# EAGLE board Modulo-regulador (EAGLE 6.4)
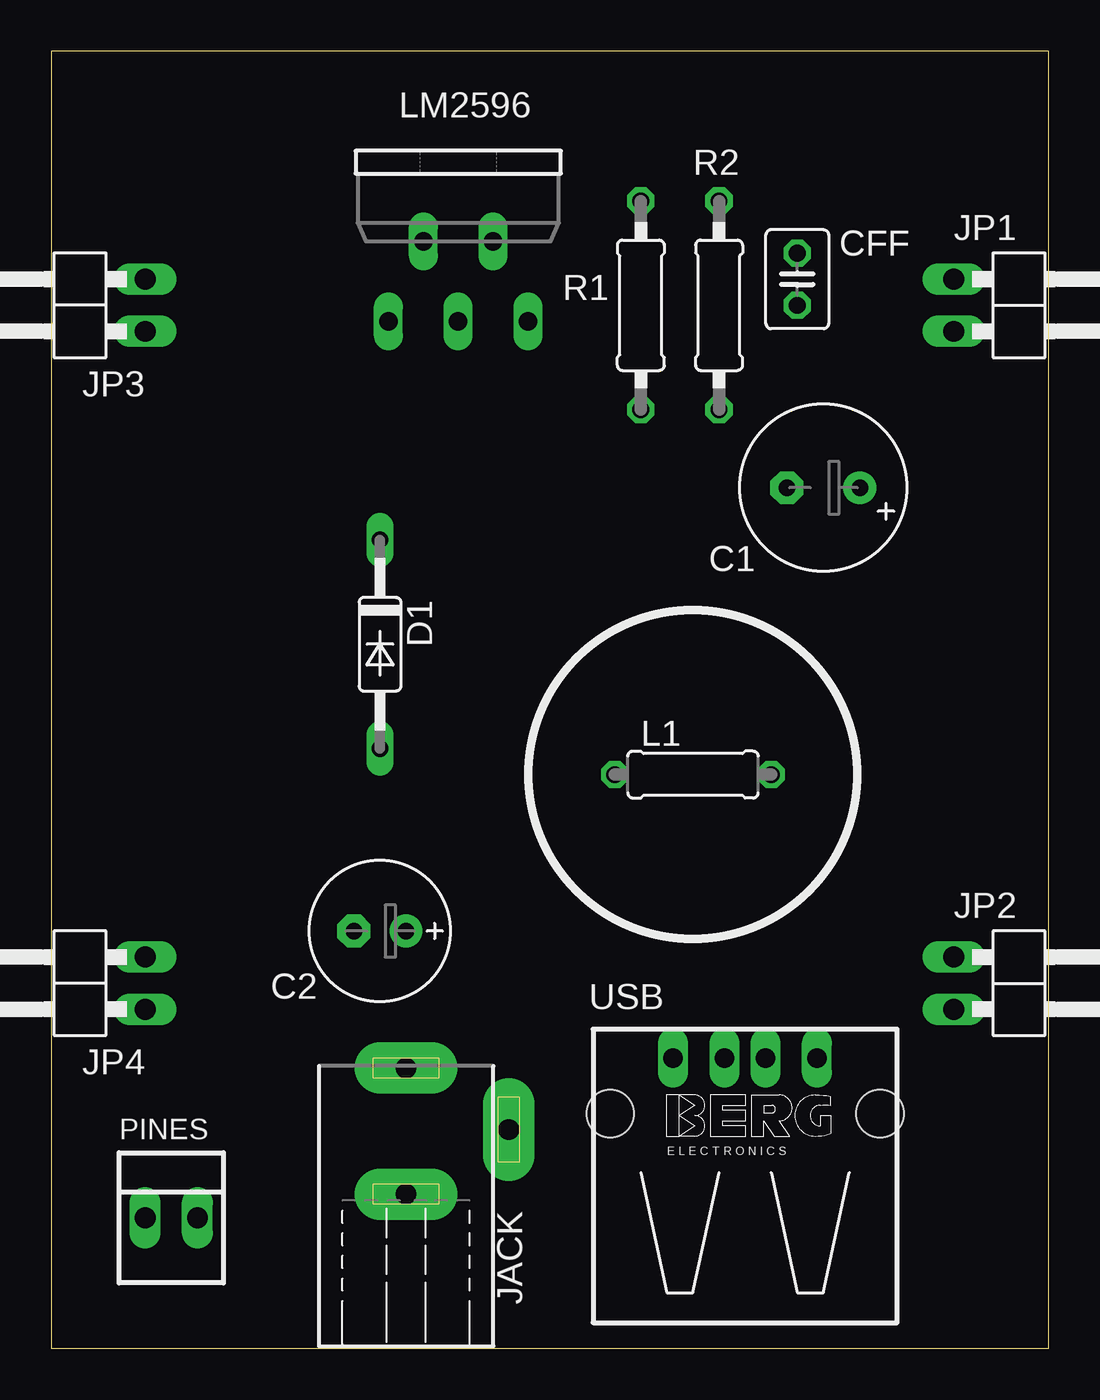
[diagram p0: board, top side]
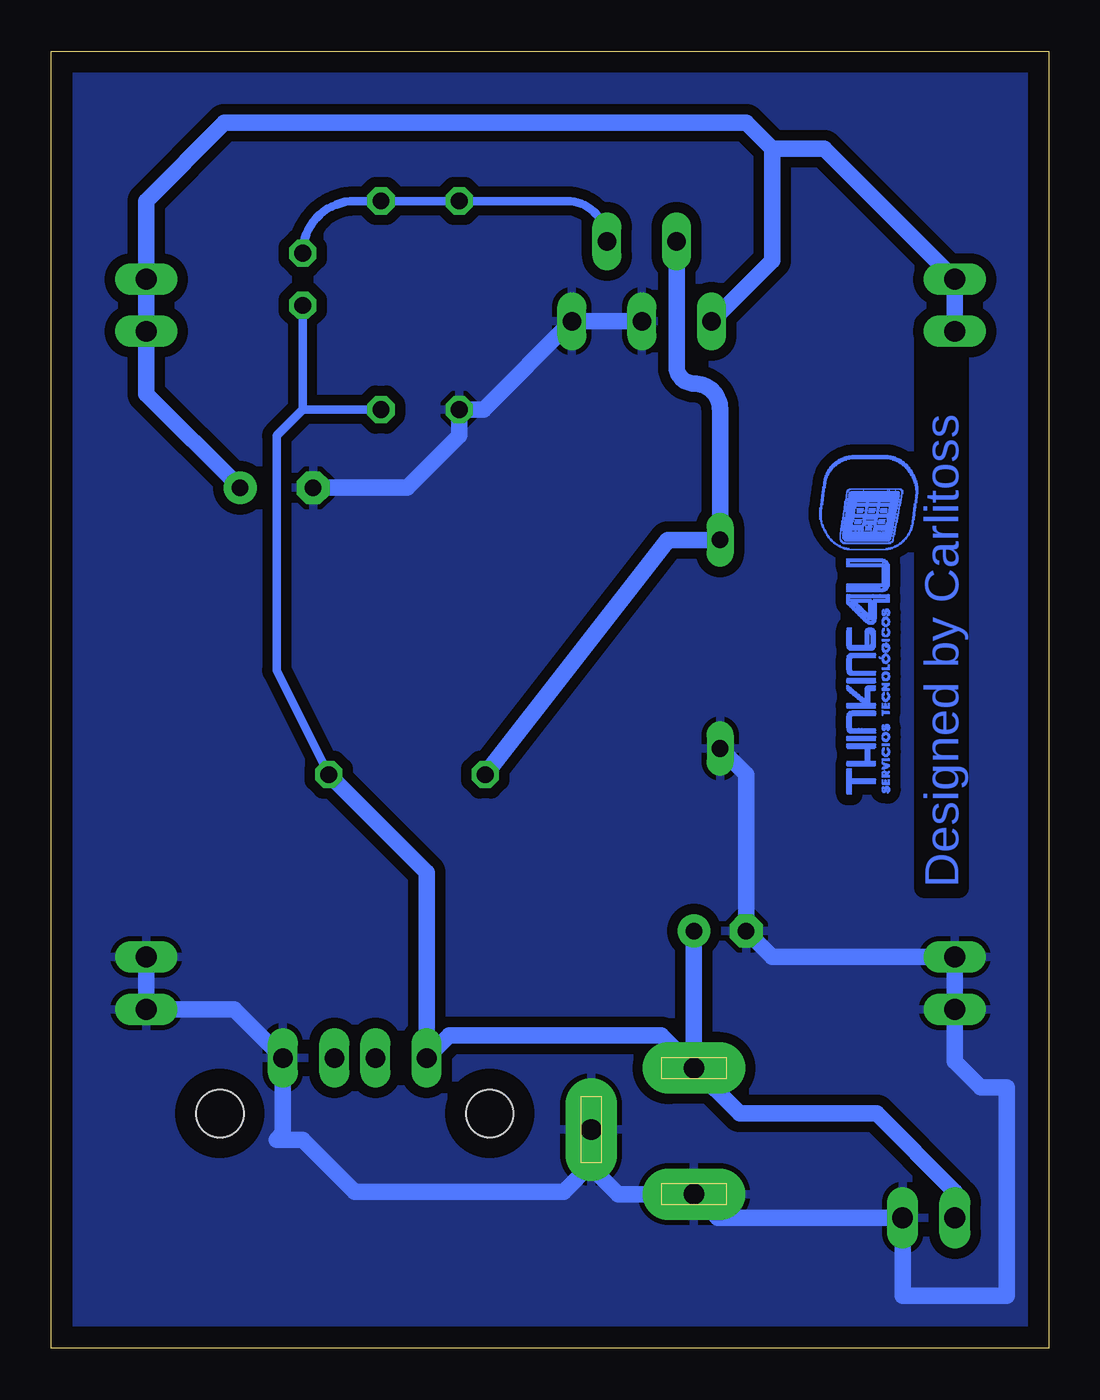
[diagram p1: board, bottom side, seen from below]

Size 48.56 x 63.17 mm. Coordinates in mm from the lower left corner, seen from the top.
Outline: 0,0 48.56,0 48.56,63.17 0,63.17 0,0
Copper layers (1*16): Top 0.035mm / dielectric 1.5mm / Bottom 0.035mm
Design rules "default *": minimum track width 10mil, minimum drill 24mil, track to track 20mil, track to pad 20mil, pad to pad 20mil, via to via 8mil, smd to smd 8mil, copper to edge 40mil, drill to drill 8mil, minimum pad ring 10mil, minimum via ring 8mil, stop-mask expansion 4mil, vias tented up to drill 0mil, thermal gap 10mil

## Footprints (pad centres in the part's own frame; a part is rotated, then mirrored left to right if it is on the bottom)
E3,5-8 = drill 0.813 pad 1.6: + -1.778,0 | drill 0.813 pad 1.6 octagon: - 1.778,0
E2,5-7 = drill 0.813 pad 1.6: + -1.27,0 | drill 0.813 pad 1.6 octagon: - 1.27,0
C025-030X050 = drill 0.813 octagon: 1 -1.27,0; 2 1.27,0
DO35-10 = drill 0.813 long: A 5.08,0; C -5.08,0
733980-62 = drill 1 pad 2.5 long: 1 0,8.57; 2 0,2.42; 3 5,5.57
1X02/90 = drill 1.016 long: 1 -1.27,-3.81; 2 1.27,-3.81
0207/7 = drill 0.813 octagon: 1 -3.81,0; 2 3.81,0
TO220-51 = drill 0.9 long: 1 -3.4,-8.4; 2 -1.7,-4.5; 3 0,-8.4; 4 1.7,-4.5; 5 3.4,-8.4
22-23-2021 = drill 1 long: 1 -1.27,0; 2 1.27,0
0207/10 = drill 0.813 octagon: 1 -5.08,0; 2 5.08,0
PN87520 = drill 0.95 long: 1 -3.5,2.71; 2 -1,2.71; 3 1,2.71; 4 3.5,2.71 | hole 2.3: -6.57,0; 6.57,0

## Placement (x,y rotation side)
C1  470uF  [E3,5-8]  37.59,41.91 180 top
C2  220uF  [E2,5-7]  16,20.32 180 top
CFF  [C025-030X050]  36.32,52.07 270 top
D1  1N5825  [DO35-10]  16,34.29 270 top
JACK  [733980-62]  17.27,5.08 0 top
JP1  [1X02/90]  47.75,50.8 270 top
JP2  [1X02/90]  47.75,17.78 270 top
JP3  [1X02/90]  0.76,50.8 90 top
JP4  [1X02/90]  0.76,17.78 90 top
L1  47uH  [0207/7]  31.24,27.94 0 top
LM2596  [TO220-51]  19.81,58.42 0 top
PINES  22-23-2021  [22-23-2021]  5.84,6.35 0 top
R1  1K  [0207/10]  28.7,50.8 270 top
R2  [0207/10]  32.51,50.8 270 top
USB  [PN87520]  33.78,11.43 0 top

## Library data of the parts
C1 C2 CFF L1 R1 R2 = rcl
D1 = diode
JACK = con-conrad
JP1-JP4 = pinhead
LM2596 = linear
PINES = con-molex; MF: MOLEX; MPN: 22-23-2021; OC_FARNELL: 1462926; OC_NEWARK: 25C3832
USB = con-berg; OC_FARNELL: unknown; OC_NEWARK: unknown

## Nets
GND: C1.- C2.- D1.A JACK.2 JACK.3 JP2.1 JP2.2 JP4.1 JP4.2 LM2596.3 LM2596.5 PINES.2 R1.2 USB.4
N$1: D1.C L1.1 LM2596.2
N$2: C1.+ JP1.1 JP1.2 JP3.1 JP3.2 LM2596.1
N$4: CFF.1 LM2596.4 R1.1 R2.1
V+: C2.+ CFF.2 JACK.1 L1.2 PINES.1 R2.2 USB.1

## Tracks (layer width: path | path; a pad name or v marks a point on that pad's centre or on a via)
GND
  Bottom 0.813: JP2.1 JP2.2 39.65,16.51 USB.4 37.28,10.47 37.59,10.16 36.32,10.16 33.78,7.62 23.62,7.62 22.27,8.97 JACK.3 22.35,10.57 22.35,8.89 20.96,7.5 JACK.2 16.12,6.35 PINES.2 7.11,2.54 2.03,2.54 2.03,12.7 3.3,12.7 4.57,13.97 JP4.1 JP4.2 13.46,19.05 C2.- 14.73,27.94 D1.A | LM2596.3 LM2596.5 27.51,45.72 R1.2 28.7,44.45 31.24,41.91 C1.-
  pour Bottom: 0.76,62.23 47.75,62.23 47.75,60.96 47.75,1.27 0.76,1.27
N$1
  Bottom 0.813: LM2596.2 18.11,47.83 arc-90 17.27,46.99 arc90 16,45.72 D1.C 18.54,39.37 L1.1
N$2
  Bottom 0.813: LM2596.1 13.46,52.97 13.46,58.42 | 13.46,58.42 14.73,59.69 40.13,59.69 43.94,55.88 JP1.1 JP1.2 43.94,46.48 C1.+ | 13.46,58.42 10.92,58.42 JP3.2 JP3.1
N$4
  Bottom 0.406: LM2596.4 arc-90 23.47,55.88 R1.1 R2.1 33.78,55.88 arc-90 CFF.1
V+
  Bottom 0.406: 36.32,45.72 37.59,44.45 37.59,33.02 L1.2 | R2.2 36.32,45.72 | 36.32,45.72 CFF.2
  Bottom 0.813: C2.+ JACK.1 | JACK.1 18.86,15.24 29.18,15.24 USB.1 30.28,23.17 L1.2 | PINES.1 4.57,7.62 8.38,11.43 15.05,11.43 JACK.1
(copper drawn outside any net)
  shapes: Bottom area x2245

## Text on the board
Bottom: Designed by Carlitoss